# Altium PCB project_buran.PcbDoc
Units mm, origin at the board's own origin, x right, y up, seen from the top; angles counter-clockwise.
Board outline 150 x 80 mm, 2 copper layers (Top Layer, Bottom Layer); 26 components, 35 nets, 185 pads, 0 vias.
Unrouted connection lines stored in the file: 32.
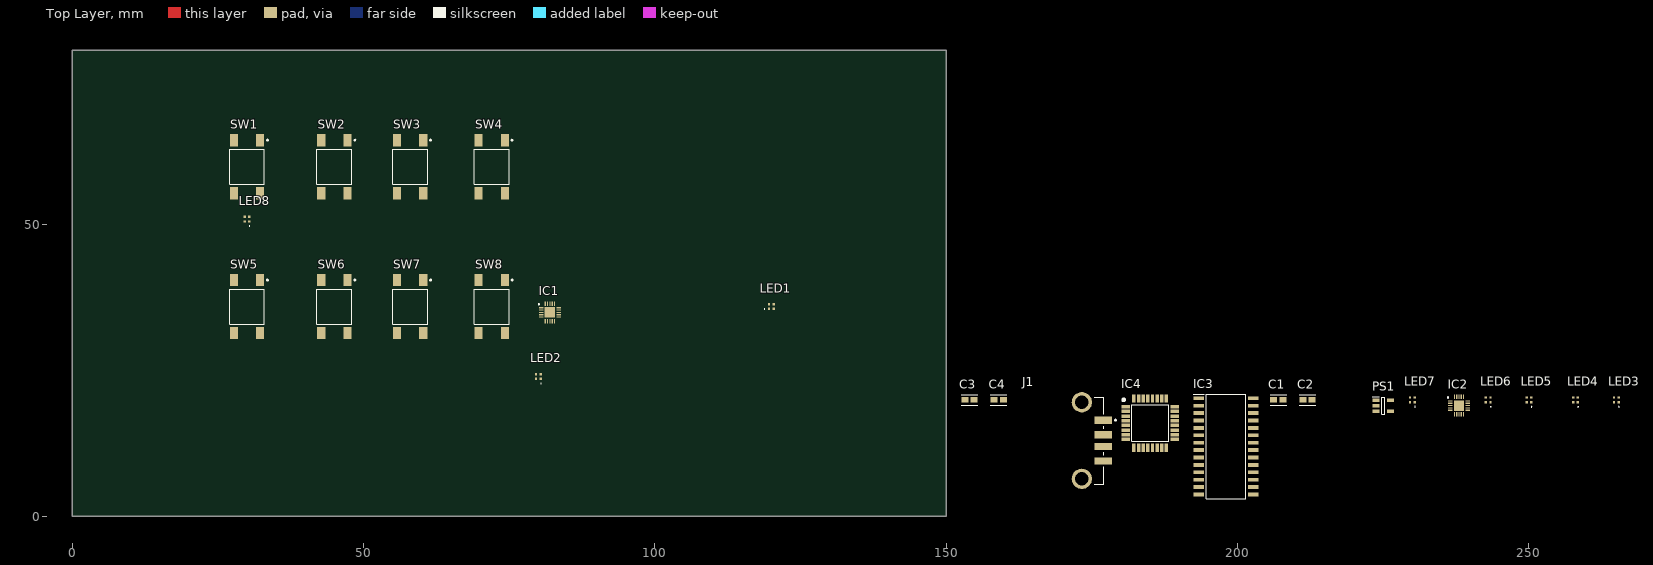
[diagram p0: Top Layer view]
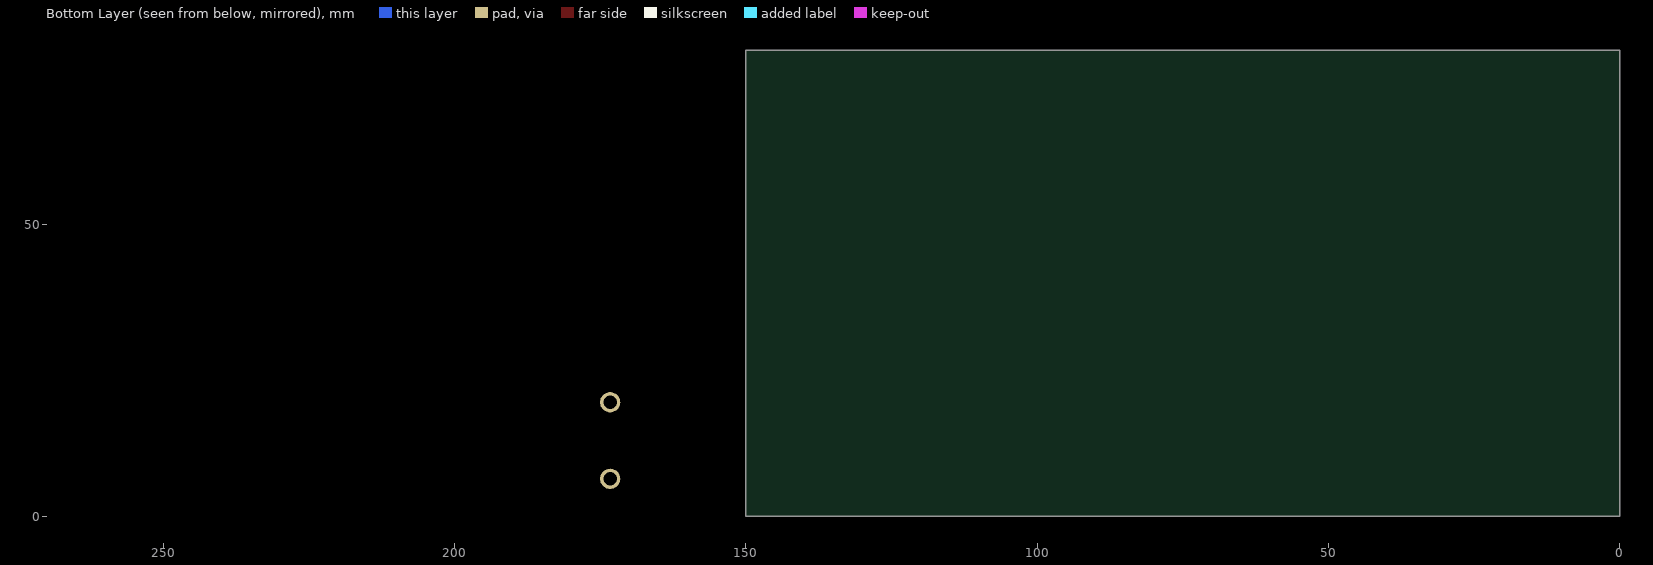
[diagram p1: Bottom Layer view, seen from below]

## Layer stack, top to bottom
Top Solder: solder mask 0.0102, Solder Resist, Dk 3.5
Top Layer: signal copper 0.0356
Dielectric 1: dielectric 0.32, FR-4, Dk 4.8
Bottom Layer: signal copper 0.0356
Bottom Solder: solder mask 0.0102, Solder Resist, Dk 3.5

## Board outline
0,0 150,0 150,80 0,80

## Design rules (kind name [scope] priority, off if disabled: settings)
Clearance [All] p1: gap=0.254 ignorepadtopadclearanceinfootprint=FALSE except(0: Arc-Hole Track-Hole SMDPad-Hole THPad-Hole Via-Hole Fill-Hole Poly-Hole Region-Hole Text-Hole)
PolygonConnect [All] p1: connectstyle=Relief reliefconductorwidth=0.254 reliefentries=4 polygonreliefangle="90 Angle" airgapwidth=0.254
RoutingVias [All] p1: holewidth=0.711 width=1.27 viastyle="Through Hole" minholewidth=0.711 minwidth=1.27 maxholewidth=0.711 maxwidth=1.27
SolderMaskExpansion [All] p1: expansion=0.102 istentingtop=FALSE
Width [All] p1: maxlimit=0.254 minlimit=0.254 preferedwidth=0.254
30 further rules are at their usual default settings.

## Components (designator, comment, footprint, x,y, rotation, side; value= is the part's Value field where it differs from the comment)
C1 "GRM188R60J106ME47D" FP-GRM188-0_1-e0_2_0_55-IPC_A 207,20 r0 top
C2 "GRM188R60J106ME47D" FP-GRM188-0_1-e0_2_0_55-IPC_A 212,20 r0 top
C3 "GRM188R60J106ME47D" FP-GRM188-0_1-e0_2_0_55-IPC_A 154,20 r0 top
C4 "GRM188R60J106ME47D" FP-GRM188-0_1-e0_2_0_55-IPC_A 159,20 r0 top
IC1 "LP5012RUKR" QFN40P300X300X80-21N-D 82,35 r0 top
IC2 "LP5012RUKR" QFN40P300X300X80-21N-D 238,19 r0 top
IC3 "AVR128DA28-I_SO" SOIC127P1030X265-28N 198,12 r0 top
IC4 "MAX3420EECJ+" QFP80P900X900X160-32N 185,16 r0 top
J1 "292303-7" FP-292303-7-MFG 170,13 r0 top
LED1 "150044M155260" 150044M155260 120,36 r0 top
LED2 "150044M155260" 150044M155260 80,24 r90 top
LED3 "150044M155260" 150044M155260 265,20 r90 top
LED4 "150044M155260" 150044M155260 258,20 r90 top
LED5 "150044M155260" 150044M155260 250,20 r90 top
LED6 "150044M155260" 150044M155260 243,20 r90 top
LED7 "150044M155260" 150044M155260 230,20 r90 top
LED8 "150044M155260" 150044M155260 30,51 r90 top
PS1 "TLV75733PDBVR" SOT95P280X145-5N 225,19 r0 top
SW1 "FSM4JSMA" TECO-FSM4JSMA_V 30,60 r0 top
SW2 "FSM4JSMA" TECO-FSM4JSMA_V 45,60 r0 top
SW3 "FSM4JSMA" TECO-FSM4JSMA_V 58,60 r0 top
SW4 "FSM4JSMA" TECO-FSM4JSMA_V 72,60 r0 top
SW5 "FSM4JSMA" TECO-FSM4JSMA_V 30,36 r0 top
SW6 "FSM4JSMA" TECO-FSM4JSMA_V 45,36 r0 top
SW7 "FSM4JSMA" TECO-FSM4JSMA_V 58,36 r0 top
SW8 "FSM4JSMA" TECO-FSM4JSMA_V 72,36 r0 top

## Footprints (in the part's own frame and the unit in brackets; to place one, negate y for a bottom-side part, rotate by r counter-clockwise, add the part's x,y. Pads: shape width x height; smd on the part's side, far side on the other; paste and mask are expansions set on the pad)
150044M155260 [mm]
  rect 0.4x0.4 smd: 1(-0.4,-0.4) 2(-0.4,0.4) 3(0.4,0.4) 4(0.4,-0.4)
  silkscreen extent -1.25,-0.5 -1.15,-0.4, body extent -0.5,-0.5 0.5,0.5, height 0.85
FP-292303-7-MFG [mm]
  rect 3x1.25 smd paste+0 mask+0: 1(6.96,3.5) 2(6.96,1) 3(6.96,-1) 4(6.96,-3.5)
  round 3.5 hole 2.3 paste-1000 mask+0: 5(3.28,6.57) 6(3.28,-6.57)
  silkscreen extent 5.4,-7.47 9.15,7.47, body extent -7.1,-8.42 8.56,8.42, height 0.25
FP-GRM188-0_1-e0_2_0_55-IPC_A [mm]
  rect 1.208x1.012 smd paste+0 mask+0: 1(-0.802,0) 2(0.802,0)
  silkscreen extent -1.41,-0.91 1.41,0.91, body extent -1.91,-1.01 1.91,1.01, height 0.25
QFN40P300X300X80-21N-D [mm]
  rect 0.8x0.2 smd: 1(-1.5,0.8) 2(-1.5,0.4) 3(-1.5,0) 4(-1.5,-0.4) 5(-1.5,-0.8) 11(1.5,-0.8) 12(1.5,-0.4) 13(1.5,0) 14(1.5,0.4) 15(1.5,0.8)
  rect 0.2x0.8 smd: 6(-0.8,-1.5) 7(-0.4,-1.5) 8(0,-1.5) 9(0.4,-1.5) 10(0.8,-1.5) 16(0.8,1.5) 17(0.4,1.5) 18(0,1.5) 19(-0.4,1.5) 20(-0.8,1.5)
  rect 1.8x1.8 smd: 21(0,0)
  silkscreen extent -2,1.3 -1.8,1.5, body extent -1.55,-1.55 1.55,1.55, height 0.8
QFP80P900X900X160-32N [mm]
  rect 1.45x0.6 smd: 1(-4.225,2.8) 2(-4.225,2) 3(-4.225,1.2) 4(-4.225,0.4) 5(-4.225,-0.4) 6(-4.225,-1.2) 7(-4.225,-2) 8(-4.225,-2.8) 17(4.225,-2.8) 18(4.225,-2) 19(4.225,-1.2) 20(4.225,-0.4) 21(4.225,0.4) 22(4.225,1.2) 23(4.225,2) 24(4.225,2.8)
  rect 0.6x1.45 smd: 9(-2.8,-4.225) 10(-2,-4.225) 11(-1.2,-4.225) 12(-0.4,-4.225) 13(0.4,-4.225) 14(1.2,-4.225) 15(2,-4.225) 16(2.8,-4.225) 25(2.8,4.225) 26(2,4.225) 27(1.2,4.225) 28(0.4,4.225) 29(-0.4,4.225) 30(-1.2,4.225) 31(-2,4.225) 32(-2.8,4.225)
  silkscreen extent -4.75,-3.15 3.15,4.2, body extent -4.5,-4.5 4.5,4.5, height 1.6
SOIC127P1030X265-28N [mm]
  rect 1.85x0.65 smd: 1(-4.675,8.255) 2(-4.675,6.985) 3(-4.675,5.715) 4(-4.675,4.445) 5(-4.675,3.175) 6(-4.675,1.905) 7(-4.675,0.635) 8(-4.675,-0.635) 9(-4.675,-1.905) 10(-4.675,-3.175) 11(-4.675,-4.445) 12(-4.675,-5.715) 13(-4.675,-6.985) 14(-4.675,-8.255) 15(4.675,-8.255) 16(4.675,-6.985) 17(4.675,-5.715) 18(4.675,-4.445) 19(4.675,-3.175) 20(4.675,-1.905) 21(4.675,-0.635) 22(4.675,0.635) 23(4.675,1.905) 24(4.675,3.175) 25(4.675,4.445) 26(4.675,5.715) 27(4.675,6.985) 28(4.675,8.255)
  silkscreen extent -5.6,-8.95 3.4,8.95, body extent -5.15,-8.95 5.15,8.95, height 2.65
SOT95P280X145-5N [mm]
  rect 1.2x0.6 smd: 1(-1.25,0.95) 2(-1.25,0) 3(-1.25,-0.95) 4(1.25,-0.95) 5(1.25,0.95)
  silkscreen extent -1.85,-1.45 0.3,1.5, body extent -1.4,-1.45 1.4,1.45, height 1.45
TECO-FSM4JSMA_V [mm] "SMD, 4-Leads, Body 6x6mm, Pitch 4.5mm"
  rect 1.4x2.1 smd: 1(2.25,4.55) 2(2.25,-4.55) 3(-2.25,4.55) 4(-2.25,-4.55)
  silkscreen extent -3,-3 3.63,4.67, body extent -3,-5 3,5, height 5.08

## Part data
C1 C2 C3 C4: library part CMP-2006-02792-2, "Chip Multilayer Ceramic Capacitors for General Purpose, 0603, 10uF, X5R, 15%, 20%, 6.3V", Capacitance=10uF, Case Code (Imperial)=0603, Case Code (Metric)=1608, Dielectric=X5R, Max Operating Temperature=85°C, Min Operating Temperature=-55°C, Package Quantity=4000, Tolerance=20%, Voltage=6.3V, Case/Package=0603, Depth=0.8mm, Height=0.8mm, Lead Free="Lead Free", Length=1.6mm, Material=Ceramic, Mount="Surface Mount", Packaging="Tape and Reel", Radiation Hardening=No, REACH SVHC="No SVHC", Termination=SMD/SMT, Thickness=0.035inch, Voltage Rating=6.3V, Voltage Rating (DC)=6.3V, Width=0.031inch
IC1 IC2: "Integrated Circuit", Manufacturer_Name="Texas Instruments", Mouser Part Number=595-LP5012RUKR, Arrow Part Number=LP5012RUKR, Arrow Price/Stock=https://www.arrow.com/en/products/lp5012rukr/texas-instruments, Datasheet Link=http://www.ti.com/lit/gpn/LP5012, Height=0.8mm, Manufacturer_Part_Number=LP5012RUKR, Mouser Price/Stock=https://www.mouser.co.uk/ProductDetail/Texas-Instruments/LP5012RUKR?qs=mAH9sUMRCts7Z0PlkfxWfA%3D%3D
IC3: "Integrated Circuit", Arrow Part Number=AVR128DA28-I/SO, Manufacturer_Name=Microchip, Mouser Part Number=579-AVR128DA28-I/SO, Arrow Price/Stock=https://www.arrow.com/en/products/avr128da28-iso/microchip-technology, Datasheet Link=https://componentsearchengine.com/Datasheets/2/AVR128DA28-I_SO.pdf, Height=2.65mm, Manufacturer_Part_Number=AVR128DA28-I/SO, Mouser Price/Stock=https://www.mouser.co.uk/ProductDetail/Microchip-Technology/AVR128DA28-I-SO?qs=xZ%2FP%252Ba9zWqZ3NQP19LtSGg%3D%3D
IC4: "Integrated Circuit", Manufacturer_Name="Maxim Integrated", Mouser Part Number=700-MAX3420EECJ, Datasheet Link=https://pdfserv.maximintegrated.com/en/ds/MAX3420E.pdf, Height=1.6mm, Manufacturer_Part_Number=MAX3420EECJ+, Mouser Price/Stock=https://www.mouser.co.uk/ProductDetail/Maxim-Integrated/MAX3420EECJ%2b?qs=1THa7WoU59F45gydMDQ7mg%3D%3D
J1: library part CMP-03360-000008-1, "CONN RCPT USB2.0 TYPEA 4P SMD RA", Current Rating=1A, Manufacturer="TE Connectivity", Temperature="-55°C to +85°C", Temperature Range High=+85°C, Temperature Range Low=-55°C, Voltage Rating=30V, Automotive=No, Category=Conn, ComponentLink2Description=Datasheet, ComponentLink2URL=https://www.te.com/usa-en/product-292303-7.html?te_bu=Cor&te_type=other&te_campaign=oct_glo_cor-oct-global-oth-prtnr-fy19-oct-octo-buy-bom_sma-298_2&elqCampaignId=35216, Conn Orientation="Right Angle", Contact Material=Gold,Nickel, Device Class L1=Connectors, Device Class L2="USB Connectors", Device Class L3=unset, Digikey Description="CONN RCPT USB2.0 TYPEA 4P SMD RA", Is Female=yes, Lead Free=Yes, Manufacturer Part Number=292303-7, Mouser Description="USB Connectors USB A R/A Recpt Assy SMT", Number Of Contacts=4, Octopart=https://octopart.com/292303-7-te+connectivity-42840369, Package=292303-7, RoHS=TRUE, Shielding=true, Usb Standard="USB 2.0"
LED1 LED2 LED3 LED4 LED5 LED6 LED7 LED8: "LED", Manufacturer_Name="Wurth Elektronik", Mouser Part Number=710-150044M155260, Datasheet Link=https://www.we-online.com/catalog/datasheet/150044M155260.pdf, Height=0.75mm, Manufacturer_Part_Number=150044M155260, Mouser Price/Stock=https://www.mouser.co.uk/ProductDetail/Wurth-Elektronik/150044M155260?qs=u16ybLDytRba39Og9E2ywA%3D%3D
PS1: "Power Supply", Manufacturer_Name="Texas Instruments", Mouser Part Number=595-TLV75733PDBVR, Arrow Part Number=TLV75733PDBVR, Arrow Price/Stock=https://www.arrow.com/en/products/tlv75733pdbvr/texas-instruments, Datasheet Link=http://www.ti.com/lit/gpn/tlv757p, Height=1.45mm, Manufacturer_Part_Number=TLV75733PDBVR, Mouser Price/Stock=https://www.mouser.co.uk/ProductDetail/Texas-Instruments/TLV75733PDBVR?qs=y6ZabgHbY%252BwAAzSntTW34w%3D%3D
SW1 SW2 SW3 SW4 SW5 SW6 SW7 SW8: library part CMP-2000-05602-2, "Swicth, SPST, 24 V, -35 to 85 degC, 4-Pin SMD, RoHS, Tape and Reel", Case\/Package=SMD/SMT, Contact Current Rating=50mA, Contact Resistance=100mOhm, Manufacturer="TE Connectivity", Max Operating Temperature=85degC, Max Voltage Rating (DC)=12V, Min Operating Temperature=-35degC, Operating Force=1.57N, Package Description="4-Pin Surface Mount Device, Body 6 x 6 mm, Pitch 4.5 mm", Package Quantity=750, Voltage Rating=24V, Actuator Length=0.055inch, Actuator Material=Polyamide, Contact Material=CopperAlloy, Contact Plating=Silver, Current Rating=50mA, Datasheet URL=http://www.te.com/commerce/DocumentDelivery/DDEController?Action=showdoc&DocId=Customer+Drawing%7F2-1437565-7%7FV%7Fpdf%7FEnglish%7FENG_CD_2-1437565-7_V.pdf%7F4-1437565-2, Datasheet Version="Rev. V, 02/2015", Electrical Life=100000Cycles, Illumination Type=Illuminated, Length=6mm, Manufacturer URL=http://www.te.com/, Mechanical Life=100000Cycles, Mount=SurfaceMount, Mounting Technology=SurfaceMount, Orientation=Straight, Package Reference=FSM4JSMA, Packaging=LoosePiece, REACH SVHC=Unknown, RoHSCompliant=true, Switch Travel=0.25mm, Termination=GullWing, Throw Configuration=SPST, Voltage Rating (DC)=24V, Width=6mm

## Nets (pads, with @x,y where several pads share a name; then routed paths per layer and width w, separated by ;. In a path a pad name is that pad's centre, name@x,y a point inside that pad or via, vN(x,y) a via of type N, cw(c..) or ccw(c..) an arc to the next point about the centre after c; other vN are vias at no path point)
/RESET: IC3.18
/SS: IC4.12
GND: C1.2 C2.2 C3.2 C4.2 IC1.15 IC2.14 IC2.15 IC3.15 IC3.21 J1.4 J1.5 J1.6 PS1.2
MISO: IC4.13
MOSI: IC4.14
OUT0: IC2.2
OUT1: IC2.3
OUT2: IC2.4
OUT3: IC2.5
OUT4: IC2.6
OUT5: IC2.7
OUT6: IC2.8
OUT7: IC2.9
OUT8: IC2.10
OUT9: IC2.11
OUT10: IC2.12
OUT11: IC2.13
OUT12: IC1.2
OUT13: IC1.3
OUT14: IC1.4
OUT15: IC1.5
OUT16: IC1.6
OUT17: IC1.7
OUT18: IC1.8
OUT19: IC1.9
OUT20: IC1.10
OUT21: IC1.11
OUT22: IC1.12
OUT23: IC1.13
SCL: IC1.18 IC2.18
SCLK: IC4.11
SDA: IC1.17 IC2.17
UPDI: IC3.19
V_UNREG: C1.1 J1.1 PS1.1 PS1.3
VCC: C2.1 C3.1 C4.1 IC1.14 IC1.16 IC2.16 IC3.20 LED1.1 LED2.1 LED3.1 LED4.1 LED5.1 LED6.1 LED7.1 LED8.1 PS1.5
pads on no net: IC1.1 IC1.19 IC1.20 IC1.21 IC2.1 IC2.19 IC2.20 IC2.21 IC3.1 IC3.2 IC3.3 IC3.4 IC3.5 IC3.6 IC3.7 IC3.8 IC3.9 IC3.10 IC3.11 IC3.12 IC3.13 IC3.14 IC3.16 IC3.17 IC3.22 IC3.23 IC3.24 IC3.25 IC3.26 IC3.27 IC3.28 IC4.1 IC4.2 IC4.3 IC4.4 IC4.5 IC4.6 IC4.7 IC4.8 IC4.9 IC4.10 IC4.15 IC4.16 IC4.17 IC4.18 IC4.19 IC4.20 IC4.21 IC4.22 IC4.23 IC4.24 IC4.25 IC4.26 IC4.27 IC4.28 IC4.29 IC4.30 IC4.31 IC4.32 J1.2 J1.3 LED1.2 LED1.3 LED1.4 LED2.2 LED2.3 LED2.4 LED3.2 LED3.3 LED3.4 LED4.2 LED4.3 LED4.4 LED5.2 LED5.3 LED5.4 LED6.2 LED6.3 LED6.4 LED7.2 LED7.3 LED7.4 LED8.2 LED8.3 LED8.4 PS1.4 SW1.1 SW1.2 SW1.3 SW1.4 SW2.1 SW2.2 SW2.3 SW2.4 SW3.1 SW3.2 SW3.3 SW3.4 SW4.1 SW4.2 SW4.3 SW4.4 SW5.1 SW5.2 SW5.3 SW5.4 SW6.1 SW6.2 SW6.3 SW6.4 SW7.1 SW7.2 SW7.3 SW7.4 SW8.1 SW8.2 SW8.3 SW8.4